# Altium PCB output.PcbDoc
Units mm, origin at the board's own origin, x right, y up, seen from the top; angles counter-clockwise.
Board outline 56 x 44 mm, 2 copper layers (Top Layer, Bottom Layer), stack 1.57 mm thick; 22 components, 29 nets, 104 pads, 63 vias.
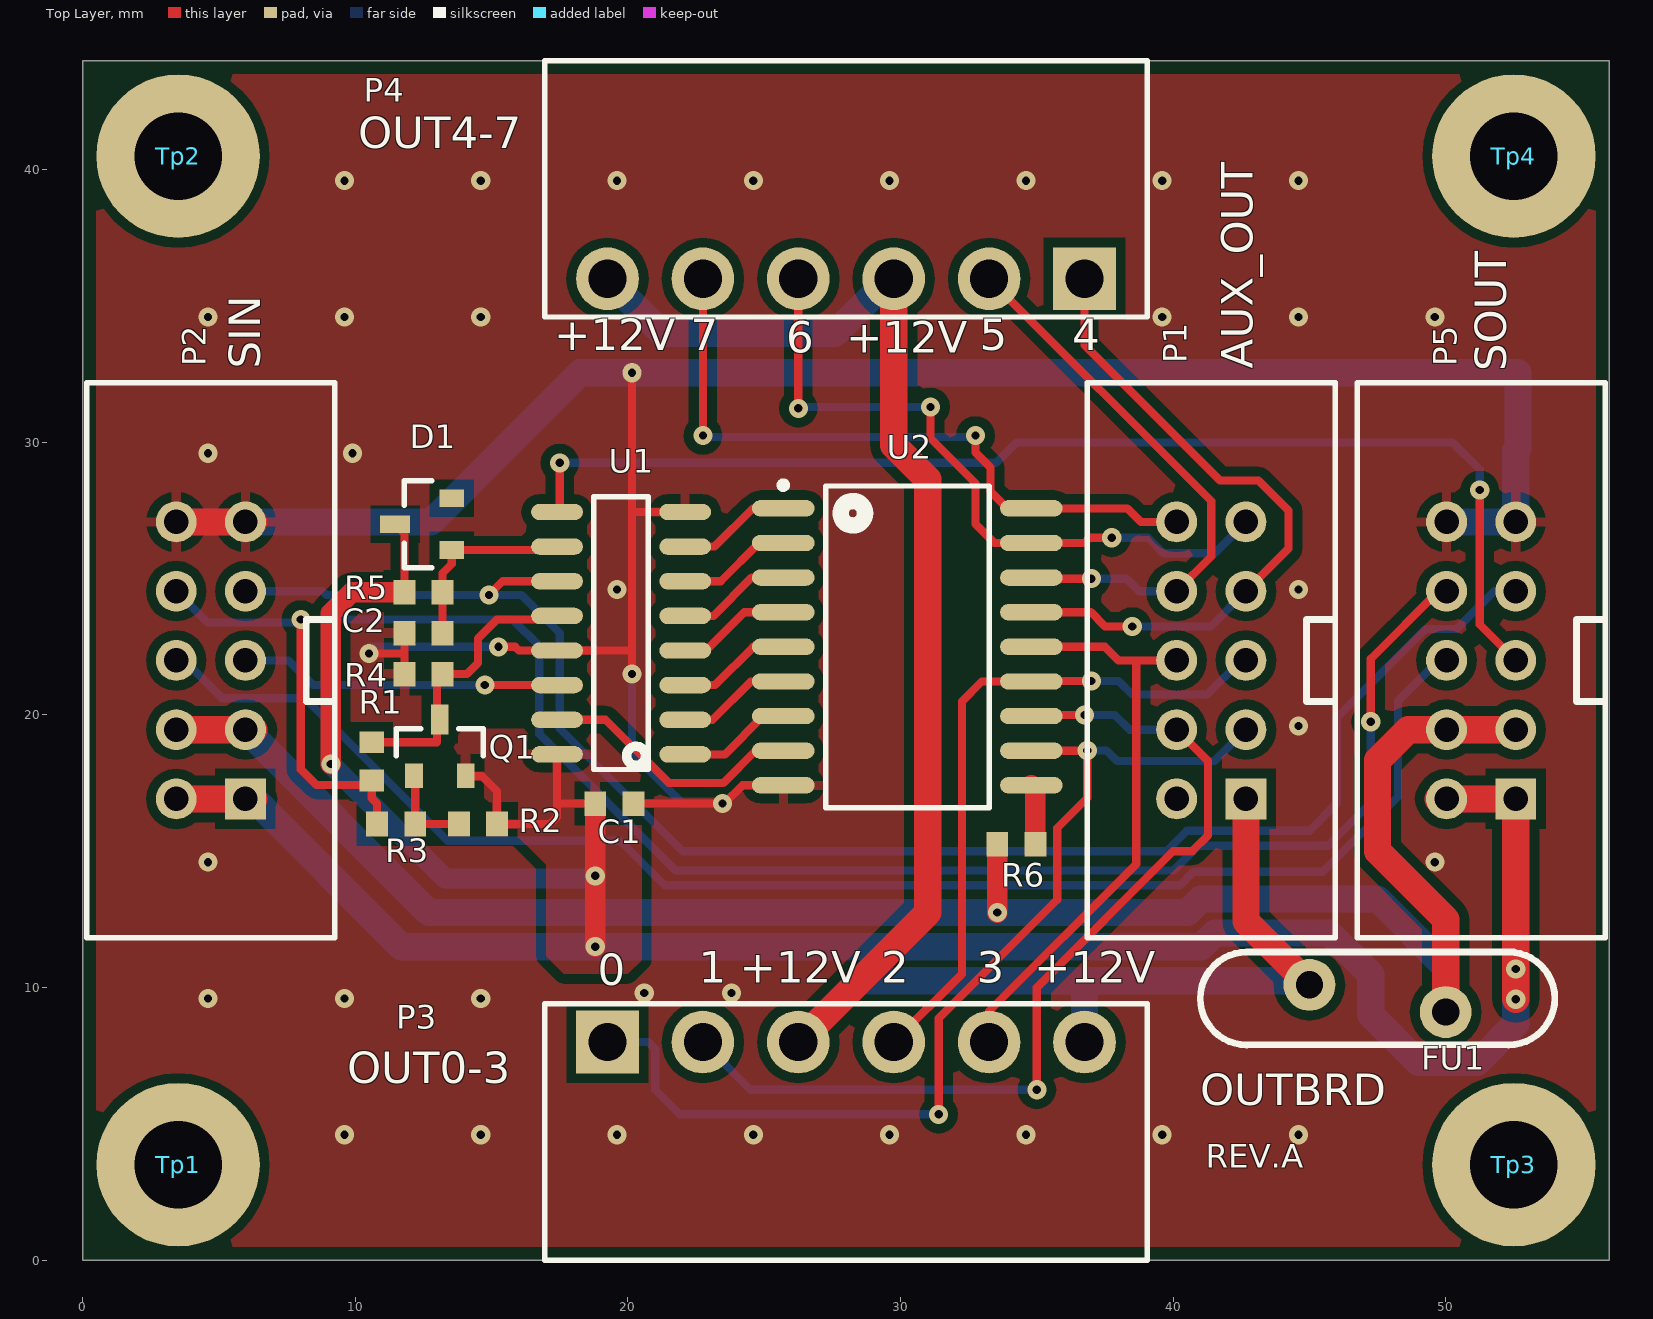
[diagram p0: Top Layer view]
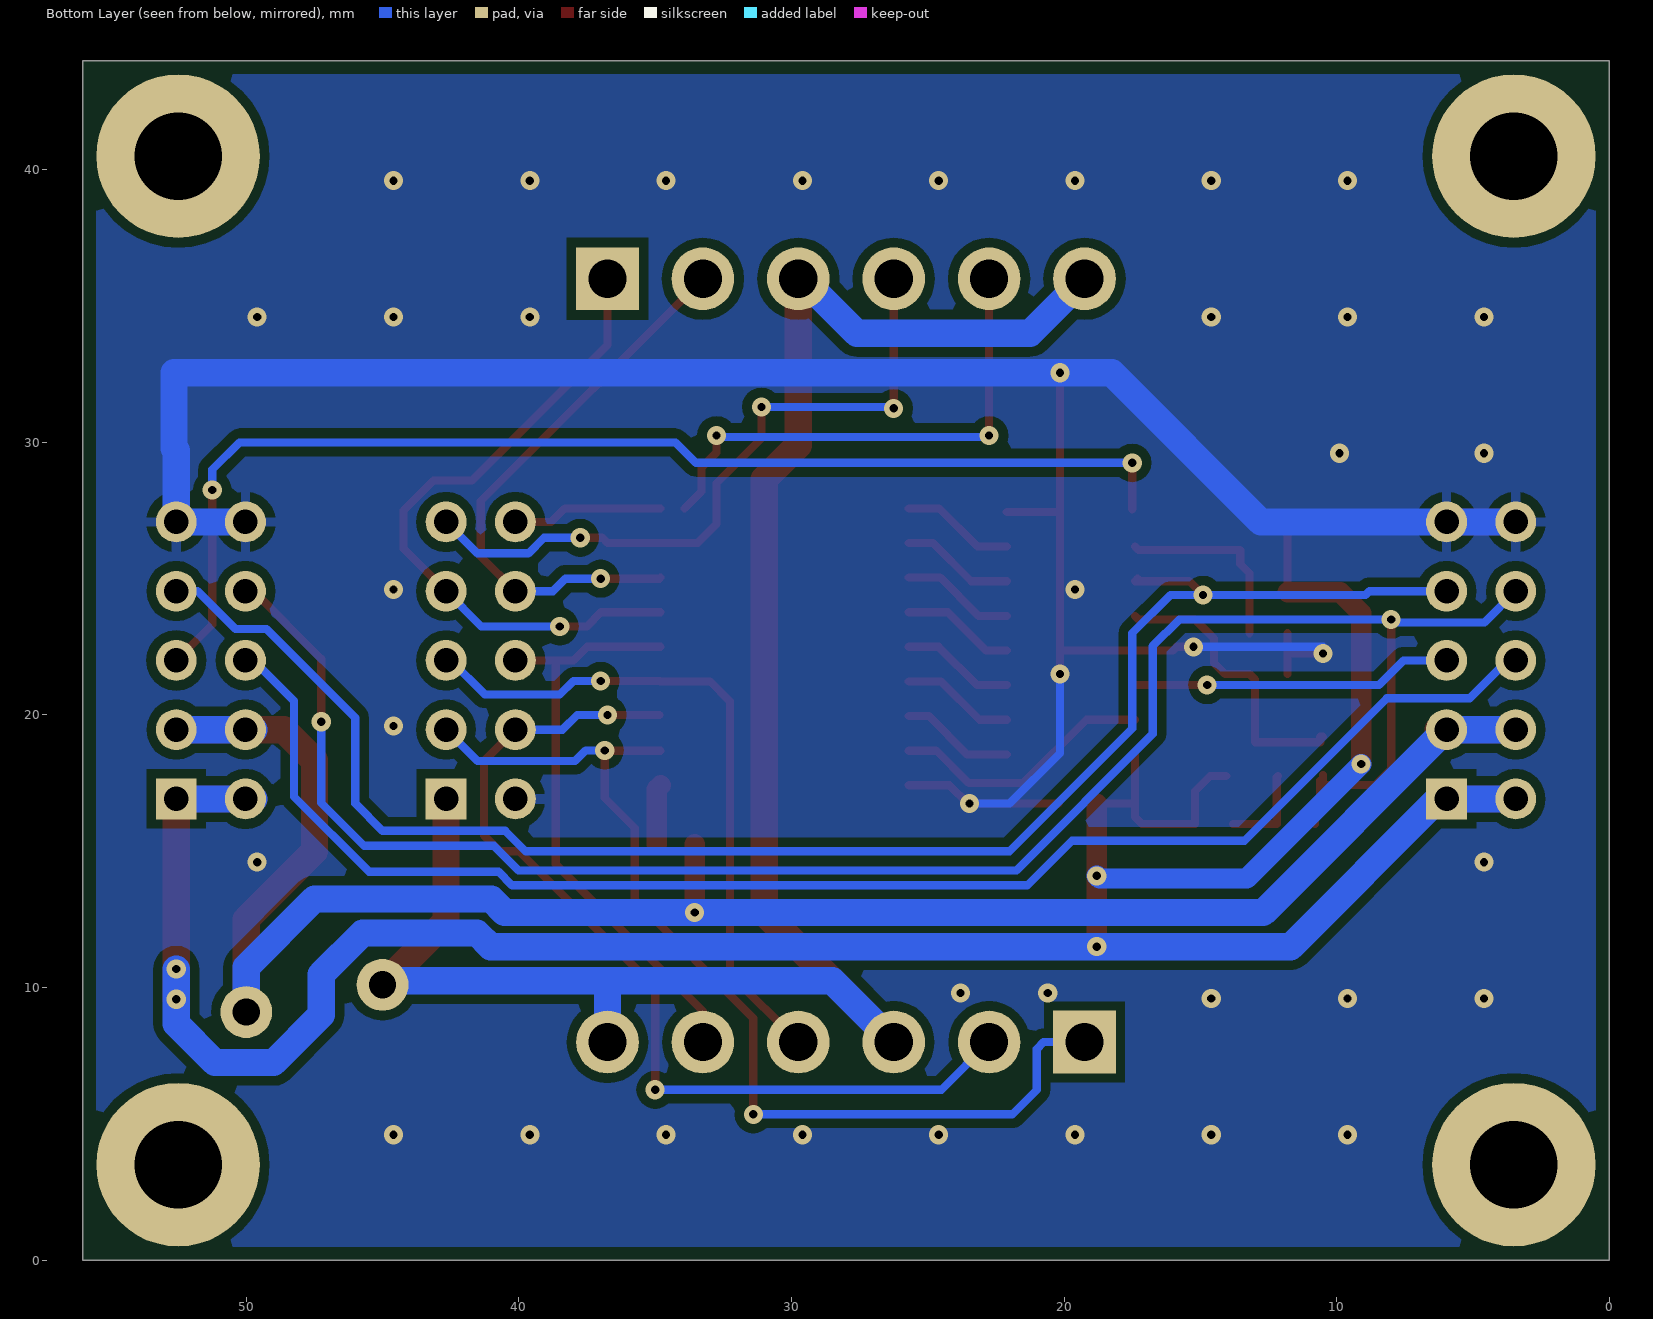
[diagram p1: Bottom Layer view, seen from below]
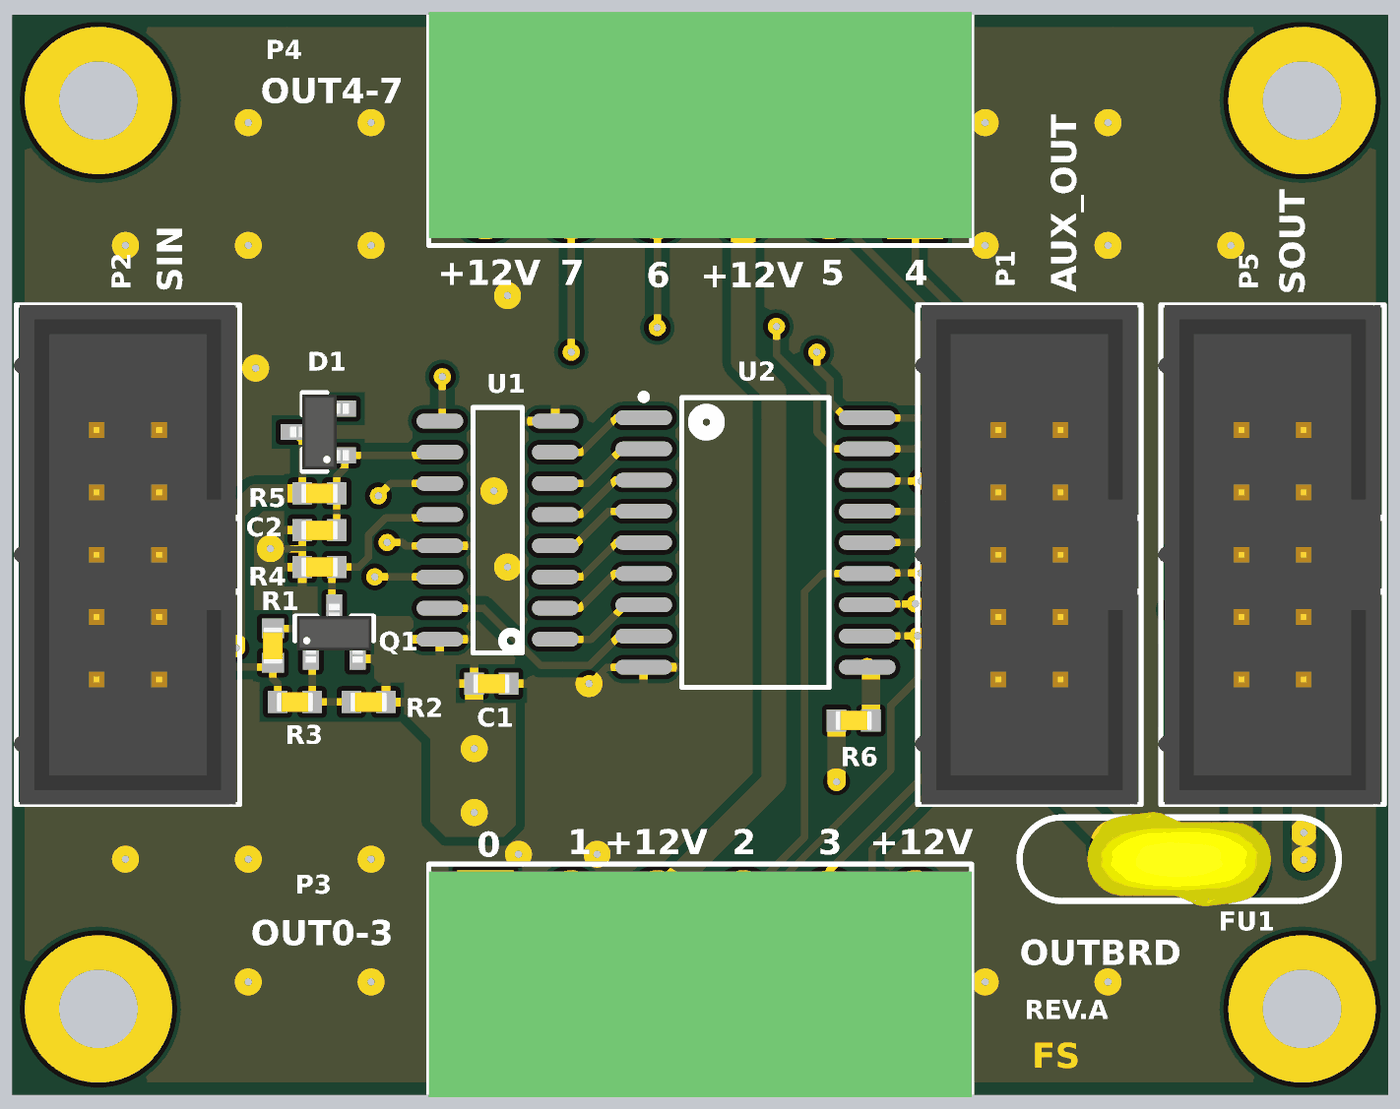
[diagram p2: 3D render of the assembled board from above, using the file's embedded part models]

## Layer stack, top to bottom
Top Solder: solder mask 0.0102, Solder Resist, Dk 3.5
Top Layer: signal copper 0.035
Dielectric1: core 1.5, FR-4, Dk 4.2
Bottom Layer: signal copper 0.035
Bottom Solder: solder mask 0.0102, Solder Resist, Dk 3.5

## Board outline
0,0 56,0 56,24 56,40 56,44 0,44

## Design rules (kind name [scope] priority, off if disabled: settings)
Clearance [All] p1: gap=0.25 except(0.35: Arc-Poly Track-Poly SMDPad-Poly THPad-Poly Via-Poly Fill-Poly Poly-Poly)
ComponentClearance [All] p1: gap=0.25 collisioncheckmode=3 verticalgap=0.25 showdistances=FALSE
HoleSize [All] p1: absolutevalues=TRUE maxlimit=10 minlimit=0.2 maxpercent=80.000 minpercent=20.000
HoleToHoleClearance [All] p1: gap=0.25 allowstackedmicrovias=TRUE
MinimumSolderMaskSliver [All] p1: minsoldermaskwidth=0.15
PlaneClearance [All] p1: clearance=0.5
PlaneConnect PlaneConnect_via [isvia] p1: planeconnectstyle=Direct reliefexpansion=0.508 reliefentries=4 reliefconductorwidth=0.254 reliefairgap=0.254
PlaneConnect [All] p2: planeconnectstyle=Relief reliefexpansion=0.6 reliefentries=4 reliefconductorwidth=0.35 reliefairgap=0.35
PolygonConnect PolygonConnect_via [isvia] p1: connectstyle=Direct reliefconductorwidth=0.254 reliefentries=4 polygonreliefangle="90 Angle" airgapwidth=0.254
PolygonConnect [All] p2: connectstyle=Relief reliefconductorwidth=0.35 reliefentries=4 polygonreliefangle="90 Angle" airgapwidth=0.35
RoutingVias [All] p1: holewidth=0.3 width=0.7 viastyle="Through Hole" minholewidth=0.2 minwidth=0.5 maxholewidth=0.5 maxwidth=1
SilkToSilkClearance [All] p1: silktosilkclearance=0.1
SilkToSolderMaskClearance [IsPad] p1: minsilkscreentomaskgap=0.15 clearancetoexposedcopper=TRUE
SolderMaskExpansion SolderMaskExpansion_via [isVia] p1: expansion=-10
SolderMaskExpansion [All] p2: expansion=0.2
Width [All] p1: maxlimit=5 minlimit=0.15 preferedwidth=0.25
22 further rules are at their usual default settings.

## Components (designator, comment, footprint, x,y, rotation, side; value= is the part's Value field where it differs from the comment)
C1 "100nF" 0603_[1608] 19.5,16.75 r180 top
C2 "100nF" 0603_[1608] 12.5,23 r0 top
D1 "BAV99" SOT-23 12.5,27 r180 top
FU1 "RXEF110" RADIAL_5.08mm_polyswitch 47.5,9.6 r180 top
P1 "OUT_AUX" HEADER_2X5_2.54MM_THD_BOXED 41.4,22 r90 top
P2 "SER_IN" HEADER_2X5_2.54MM_THD_BOXED 4.7,22 r90 top
P3 "OUT0-3" TBLOCK_1X6_3.5MM_HOR_THD 28,8 r0 top
P4 "OUT4-7" TBLOCK_1X6_3.5MM_HOR_THD 28,36 r180 top
P5 "SER_OUT" HEADER_2X5_2.54MM_THD_BOXED 51.3,22 r90 top
Q1 "BC807" SOT-23 13.1,18.8 r90 top
R1 "NP" 0603_[1608] 10.6,18.3 r270 top
R2 "4K7" 0603_[1608] 14.5,16 r0 top
R3 "10K" 0603_[1608] 11.5,16 r180 top
R4 "4K7" 0603_[1608] 12.5,21.5 r180 top
R5 "100K" 0603_[1608] 12.5,24.5 r180 top
R6 "0R" 0603_[1608] 34.25,15.25 r0 top
Tp1 "" Hole_M3x6mm 3.5,3.5 r0 top locked
Tp2 "" Hole_M3x6mm 3.5,40.5 r0 top locked
Tp3 "" Hole_M3x6mm 52.5,3.5 r0 top
Tp4 "" Hole_M3x6mm 52.5,40.5 r0 top
U1 "74HC595" SOIC16 19.75,23 r180 top
U2 "ULN2803" SOIC18 30.25,22.5 r0 top

## Footprints (in the part's own frame and the unit in brackets; to place one, negate y for a bottom-side part, rotate by r counter-clockwise, add the part's x,y. Pads: shape width x height; smd on the part's side, far side on the other; paste and mask are expansions set on the pad)
0603_[1608] [mm] "Chip Capacitor, Body 1.6x0.8mm, IPC High Density"
  rect 0.8x0.9 smd: 1(-0.7,0) 2(0.7,0)
  body extent -0.75,-0.4 0.75,0.4, height 0.67
HEADER_2X5_2.54MM_THD_BOXED [mm] "pin header 2.54mm 2row 10pin boxed"
  rect 1.5x1.5 hole 0.9: 1(-5.08,-1.27)
  round 1.5 hole 0.9: 2(-5.08,1.27) 3(-2.54,-1.27) 4(-2.54,1.27) 5(0,-1.27) 6(0,1.27) 7(2.54,-1.27) 8(2.54,1.27) 9(5.08,-1.27) 10(5.08,1.27)
  silkscreen extent -10.18,-4.55 10.18,4.55, body extent -10.18,-4.4 10.18,4.65, height 8.9
Hole_M3x6mm [mm]
  round 6 hole 3.2 paste-10: 1(0,0)
RADIAL_5.08mm_polyswitch [mm]
  round 1.9 hole 1: 1(-2.5,0.5) 2(2.5,-0.5)
  silkscreen extent -6.5,-1.7 6.5,1.7, body extent -3.75,-1.92 3.74,1.93, height 10.74
SOIC16 [mm] "SOIC, 16-Leads, Body 9.9x3.9mm, Pitch 1.27mm, IPC High Density"
  oval 1.9x0.6 smd: 1(-2.35,4.445) 2(-2.35,3.175) 3(-2.35,1.905) 4(-2.35,0.635) 5(-2.35,-0.635) 6(-2.35,-1.905) 7(-2.35,-3.175) 8(-2.35,-4.445) 9(2.35,-4.445) 10(2.35,-3.175) 11(2.35,-1.905) 12(2.35,-0.635) 13(2.35,0.635) 14(2.35,1.905) 15(2.35,3.175) 16(2.35,4.445)
  silkscreen extent -1,-5 1,5, body extent -2,-5 2,5, height 1.91
SOIC18 [mm] "SOIC, 18-Leads, Body 11.5x7.5mm, Pitch 1.27mm, IPC Medium Density"
  oval 2.3x0.6 smd: 1(-4.55,5.08) 2(-4.55,3.81) 3(-4.55,2.54) 4(-4.55,1.27) 5(-4.55,0) 6(-4.55,-1.27) 7(-4.55,-2.54) 8(-4.55,-3.81) 9(-4.55,-5.08) 10(4.55,-5.08) 11(4.55,-3.81) 12(4.55,-2.54) 13(4.55,-1.27) 14(4.55,0) 15(4.55,1.27) 16(4.55,2.54) 17(4.55,3.81) 18(4.55,5.08)
  silkscreen extent -4.67,-5.9 3,6.05, body extent -3.8,-5.95 3.8,5.95, height 2.65
SOT-23 [mm] "SOT23, 3-Leads, Body 2.9x1.3mm, Pitch 0.95mm, Lead Span 2.5mm, IPC High Density"
  rect 0.9x0.65 smd: 1(-1.038,0.95) 2(-1.038,-0.95)
  rect 1.1x0.65 smd: 3(1.038,0)
  silkscreen extent -0.3,-1.6 0.7,1.6, body extent -1.2,-1.52 1.2,1.52, height 1.22
TBLOCK_1X6_3.5MM_HOR_THD [mm] "3,50mm - PCB Horizontal - 06p"
  rect 2.3x2.3 hole 1.4: 1(-8.75,0)
  round 2.3 hole 1.4: 2(-5.25,0) 3(-1.75,0) 4(1.75,0) 5(5.25,0) 6(8.75,0)
  silkscreen extent -11.05,-8 11.05,1.4, body extent -11.05,-8.1 11.05,1.1, height 7.21

## Part data
C1 C2: library part Cap, "Ceramic X5R 6.3V, 10V"
D1: "SOT23"
FU1: library part FuseAutoReset, "Fuse"
P1 P2 P5: library part "Header 5X2", "Header, 5-Pin, Dual row"
P3 P4: library part "Header 6", "Header, 6-Pin"
Q1: "PNP transistor"
R1 R2 R3 R4 R5 R6: library part Res1, "Resistor"
Tp1 Tp2 Tp3 Tp4: library part Test_point
U1: "8-bit shift register with 3-state output registers"
U2: "BJT Darlinton Array"

## Via types
v1: diameter 0.7, hole 0.3, Top Layer to Bottom Layer, 63 vias

## Nets (pads, with @x,y where several pads share a name; then routed paths per layer and width w, separated by ;. In a path a pad name is that pad's centre, name@x,y a point inside that pad or via, vN(x,y) a via of type N, cw(c..) or ccw(c..) an arc to the next point about the centre after c; other vN are vias at no path point)
+12V: FU1.1 P2.3 P2.4 P5.3 P5.4 R6.1 | length 74.6
  Top Layer w0.75: v1(33.55,12.75) R6.1
  Top Layer w1: P2.4@3.73,19.46 P2.3 P2.3@6.27,19.46 ; FU1.1@50,9.5 50,12.5 47.5,15 47.5,18.336 48.624,19.46 P5.4 P5.3@52.27,19.46
  Bottom Layer w1: P2.4@3.73,19.46 P2.3 5.991,19.46 12.701,12.75 40.518,12.75 41.018,13.25 47.5,13.25 50,10.75 FU1.1 ; P5.4@49.73,19.46 P5.4 P5.3@52.27,19.46
GND: C1.1 C2.1 P1.2 P2.9 P2.10 P5.9 P5.10 R4.2 U1.8 U1.13 U2.9 | length 99.8
  Top Layer w0.3: v1(10.5,22.25) 11.8,22.25 ; R4.2 11.8,22.25 ; C2.1 11.8,22.25 ; v1(15.25,22.5) 15.865,22.5 16,22.365 U1.13 20.09,22.365 20.155,22.3 ; v1(20.155,32.555) 20.155,27.445 ; C1.1 v1(23.472,16.75) ; v1@20.25,21.405 v1(20.155,21.5) 20.155,22.3 ; U1.8 20.155,27.445 ; v1@23.528,16.75 24.198,17.42 U2.9 ; 20.155,22.3 20.155,27.445
  Top Layer w1: P2.10@3.73,27.08 P2.9 P2.9@6.27,27.08
  Bottom Layer w0.3: v1@10.5,22.5 v1(15.25,22.5) ; v1(20.155,21.5) 20.155,18.595 22,16.75 v1(23.472,16.75)
  Bottom Layer w1: P2.10@3.73,27.08 P2.9 12.78,27.08 18.25,32.55 v1@20.155,32.55 ; v1@20.2,32.55 52.65,32.55 52.65,29.78 52.57,29.7 P5.9 ; P5.10 P5.9@52.27,27.08
  other v1: 9.6,4.6 14.6,4.6 19.6,4.6 24.6,4.6 29.6,4.6 34.6,4.6 39.6,4.6 44.6,4.6 4.6,9.6 9.6,9.6 14.6,9.6 20.6,9.8 23.8,9.8 4.6,14.6 49.6,14.6 44.6,19.6 19.6,24.6 44.6,24.6 4.6,29.6 9.9,29.6 4.6,34.6 9.6,34.6 14.6,34.6 39.6,34.6 44.6,34.6 49.6,34.6 9.6,39.6 14.6,39.6 19.6,39.6 24.6,39.6 29.6,39.6 34.6,39.6 39.6,39.6 44.6,39.6
NetC2_2: C2.2 D1.1 R5.1 U1.10 | length 7.1
  Top Layer w0.3: C2.2 R5.1 13.2,25.2 13.538,25.538 D1.1 17.275,26.05 U1.10
NetFU1_2: FU1.2 P1.1 P3.3 P3.6 P4.3 P4.6 | length 72.3
  Top Layer w1: P3.3 31,12.75 31,28.647 29.75,29.897 P4.3 ; P1.1 42.67,12.43 FU1.2
  Bottom Layer w1: P4.6 21.25,34 27.6,34 29.6,36 P4.3 ; P3.3 28.5,10.25 44.85,10.25 FU1.2 ; P3.6 36.75,10.175
NetP2_5: P2.5 U1.14 | length 11.8
  Top Layer w0.3: v1(14.75,21.1) 17.395,21.1 U1.14
  Bottom Layer w0.3: P2.5 7.551,22 8.451,21.1 v1(14.75,21.1)
NetP2_6: P2.6 P5.6 | length 54.9
  Bottom Layer w0.3: P2.6@3.73,22 5.12,20.61 8.163,20.61 13.386,15.386 19.714,15.386 21.35,13.75 40.245,13.75 40.745,14.25 45.5,14.25 48.25,17 48.25,20.52 P5.6@49.73,22
NetP2_7: P2.7 P5.7 U1.11 | length 61.1
  Top Layer w0.3: v1(14.9,24.4) 15.405,24.905 U1.11@17.21,24.905 ; U1.11@17.21,24.905 17.305,25 U1.11 U1.11@17.21,24.905
  Bottom Layer w0.3: P2.7 8.8,24.54 8.94,24.4 v1(14.9,24.4) 16.1,24.4 17.5,23 17.5,19.5 22,15 39.75,15 40.5,15.75 45,15.75 46,16.75 46,19.896 49.254,23.15 50.4,23.15 51.79,24.54 P5.7@52.27,24.54
NetP2_8: P2.8 P5.8 R1.2 R3.2 | length 70.1
  Top Layer w0.3: v1(8,23.5) 8,18 8.575,17.425 R1.2@10.6,17.425 ; R1.2@10.5,17.6 R1.2@10.5,17.8 ; R1.2 R1.2@10.6,17.425 ; R3.2 10.8,16.75 10.6,16.95 R1.2@10.6,17.425 ; v1(47.25,19.75) 47.25,22.06 P5.8@49.73,24.54
  Bottom Layer w0.3: P2.8 4.58,23.39 7.89,23.39 v1(8,23.5) 15.773,23.5 16.75,22.523 16.75,19.301 21.751,14.3 40.017,14.3 40.917,15.2 45.672,15.2 47.25,16.778 v1(47.25,19.75)
NetP5_5: P5.5 U1.9 | length 43.7
  Top Layer w0.3: U1.9@17.5,27.545 v1(17.5,29.25) ; v1(51.25,28.25) 51.25,23.32 P5.5
  Bottom Layer w0.3: v1(17.5,29.25) 33.5,29.25 34.25,30 50.25,30 51.25,29 v1(51.25,28.25)
NetQ1_1: Q1.1 R2.1 R3.1 | length 3.4
  Top Layer w0.3: Q1.1 12.2,17.713 R3.1 R2.1
NetQ1_3: Q1.3 R1.1 R4.1 U1.12 | length 10.7
  Top Layer w0.3: R1.1@10.5,19.2 R1.1@10.6,19.2 ; R1.1 13,19 13,19.1 13,21.3 R4.1 14.089,21.5 14.5,21.911 14.5,22.811 15.189,23.5 17.265,23.5 U1.12
NetR6_2: R6.2 U2.10 | length 2.2
  Top Layer w0.75: U2.10 34.95,17.27 R6.2
O0: P1.3 P3.1 U2.11 | length 37.9
  Top Layer w0.3: 31.4,5.7 31.4,8.872 35.75,13.222 35.75,15.85 36.85,16.95 v1@36.85,18.69 ; U2.11 v1@36.85,18.69 ; v1(36.85,18.7) v1@36.85,18.69
  Bottom Layer w0.3: P3.1 20.75,8 21,7.75 21,6.25 21.9,5.35 v1(31.4,5.35) ; v1(36.85,18.7) 37.55,18.7 37.94,18.31 41.52,18.31 P1.3
O1: P1.4 P3.2 U2.12 | length 35.2
  Top Layer w0.3: U2.12@34.84,20 v1(36.75,20) ; v1(35,6.25) 35,10 40,15 40.7,15 41.28,15.58 41.28,18.31 P1.4
  Bottom Layer w0.3: P3.2 24.5,6.25 v1(35,6.25) ; v1(36.75,20) 37.86,20 38.4,19.46 P1.4
O2: P1.5 P3.4 U2.13 | length 25
  Top Layer w0.3: P3.4 32.25,10.5 32.25,20.5 32.98,21.23 U2.13 34.82,21.25 v1(37,21.25)
  Bottom Layer w0.3: v1(37,21.25) 38,21.25 38.5,20.75 41.25,20.75 42.5,22 P1.5
O3: P1.6 P3.5 U2.14 | length 21.9
  Top Layer w0.3: P3.5 33.25,9.131 38.65,14.531 38.65,21.95 38.6,22 ; U2.14 36.75,22.5 37.5,22.5 38,22 38.6,22 ; P1.6@40.08,21.95 P1.6 38.6,22
O4: P1.7 P4.1 U2.15 | length 24.7
  Top Layer w0.3: U2.15 36.98,23.77 37.5,23.25 v1(38.5,23.25) ; P4.1 36.75,33.57 41.717,28.603 43.127,28.603 44.23,27.5 44.23,26.1 P1.7
  Bottom Layer w0.3: v1(38.5,23.25) 41.38,23.25 P1.7
O5: P1.8 P4.2 U2.16 | length 20.9
  Top Layer w0.3: P4.2 41.4,27.85 41.4,25.81 P1.8 ; U2.16 34.84,25 v1(37,25)
  Bottom Layer w0.3: v1(37,25) 38.29,25 38.75,24.54 P1.8
O6: P1.9 P4.4 U2.17 | length 25.6
  Top Layer w0.3: v1(26.25,31.25) P4.4 ; v1(31.1,31.3) 31.1,30.15 32.75,28.5 32.75,27 33.44,26.31 U2.17 36.75,26.31 36.94,26.5 v1(37.75,26.5)
  Bottom Layer w0.3: v1(26.25,31.25) 26.3,31.3 v1(31.1,31.3) ; v1(37.75,26.5) 39.084,26.5 39.654,25.93 41.52,25.93 P1.9
O7: P1.10 P4.5 U2.18 | length 24.5
  Top Layer w0.3: v1(22.75,30.25) P4.5 ; v1(32.75,30.25) 32.75,29.63 33.3,29.08 33.3,28.2 U2.18@33.92,27.58 ; U2.18 38.32,27.58 38.82,27.08 P1.10
  Bottom Layer w0.3: v1(22.75,30.25) 22.8,30.2 32.7,30.2 v1(32.75,30.25)
Q0: U1.15 U2.8 | length 9.8
  Top Layer w0.3: U1.15 19.175,19.825 21.5,17.5 23.5,17.5 24.69,18.69 U2.8
Q1: U1.1 U2.7 | length 4.2
  Top Layer w0.3: U1.1 23.555,18.555 24.96,19.96 U2.7
Q2: U1.2 U2.6 | length 4.2
  Top Layer w0.3: U1.2 23.103,19.825 24.508,21.23 U2.6
Q3: U1.3 U2.5 | length 4.2
  Top Layer w0.3: U1.3 22.105,21.1 23.2,21.1 24.6,22.5 U2.5
Q4: U1.4 U2.4 | length 4.2
  Top Layer w0.3: U1.4 22.865,22.365 24.27,23.77 U2.4
Q5: U1.5 U2.3 | length 4.2
  Top Layer w0.3: U1.5 23.135,23.635 24.54,25.04 U2.3
Q6: U1.6 U2.2 | length 4.2
  Top Layer w0.3: U1.6 23.405,24.905 24.81,26.31 U2.2
Q7: U1.7 U2.1 | length 4.2
  Top Layer w0.3: U1.7 23.175,26.175 24.58,27.58 U2.1
VCC: C1.2 D1.3 P2.1 P2.2 P5.1 P5.2 Q1.2 R2.2 R5.2 U1.16 | length 108.2
  Top Layer w0.3: D1.3 11.8,26.663 R5.2 ; Q1.2 14.638,17.762 15.2,17.2 R2.2 17.145,16 17.4,16.255 17.4,16.75 ; U1.16 17.4,16.75 ; C1.2 17.4,16.75
  Top Layer w0.75: v1(9.1,18.2) 9.1,23.725 9.875,24.5 R5.2 ; v1(18.8,11.5) C1.2
  Top Layer w1: P2.2@3.73,16.92 P2.1 P2.1@6.27,16.92 ; P5.2@49.73,16.92 P5.2 P5.1@52.27,16.92 ; v1(52.57,9.57) v1(52.57,10.68) P5.1
  Bottom Layer w0.75: v1(9.1,18.2) 13.3,14 18.7,14 v1(18.8,14.1)
  Bottom Layer w1: P2.2@3.73,16.92 P2.1 6.27,16.92 11.69,11.5 v1(18.8,11.5) 41.036,11.5 41.536,12 45.732,12 47.25,10.482 47.25,9 49,7.25 51.15,7.25 52.57,8.67 v1(52.57,9.57) v1(52.57,10.68) ; P5.2@49.73,16.92 P5.2 P5.1@52.27,16.92
pads on no net: D1.2 Tp1.1 Tp2.1 Tp3.1 Tp4.1

## Polygon pours and split planes (outlines as drawn)
GND on Top Layer "topgnd" (solid, remove dead copper, pour order 11): 0.5,43.5 55.5,43.5 55.5,0.5 0.5,0.5
VCC on Top Layer "topvcc" (solid, remove dead copper, pour order 6): 14.5,19.5 20.5,19.5 20.5,18.5 20.5,11.5 20.5,11 20.25,10.75 20,10.5 19.5,10.5 17.64,10.5 17.355,10.785 17,11.14 17,12.5 17,14.5 16.5,15 16,15.5 15.5,15.5 14.216,15.5 13.05,16.666 13.05,16.75 13.05,18.45 13,18.5 14,19.5
GND on Bottom Layer "botgnd" (solid, remove dead copper, pour order 7): 0.5,43.5 55.5,43.5 55.5,0.5 0.5,0.5

## Silkscreen, mask and mechanical layers (free items; w line width, h text height)
Top Overlay:
  text "OUT4-7" at 10.1,40.4 h2
  text "+12V" at 17.3,33 h2
  text "7" at 22.3,33 h2
  text "5" at 32.9,33 h2
  text "4" at 36.3,33 h2
  text "6" at 25.8,32.9 h2
  text "+12V" at 28,32.9 h2
  text "SIN" at 6.9,32.7 h2 r90
  text "AUX_OUT" at 43.3,32.7 h2 r90
  text "SOUT" at 52.6,32.6 h2 r90
  text "1" at 22.6,9.8 h2
  text "+12V" at 24.1,9.8 h2
  text "2" at 29.3,9.8 h2
  text "3" at 32.8,9.8 h2
  text "+12V" at 34.9,9.8 h2
  text "0" at 18.9,9.7 h2
  text "OUT0-3" at 9.7,6.1 h2
  text "OUTBRD" at 41,5.3 h2
  text "REV.A" at 41.2,3.1 h1.5
Top Solder:
  text "FS" at 41.5,1.1 h2
Bottom Solder:
  text "FS" at 43.3,1.2 h2
Outline:
  lines w0.2: 0,0 0,44 56,44 56,0 0,0
Drawing:
  circle w0.127: c0,0 r3
  circle w0.127: c0,0 r1.55
  lines w0.127: -4,0 4,0 ; 0,-4 0,4
  text "Mechanical Characteristics" at -0.6,48 h5
Assembly_top:
  text "Assembly TOP" at 20,48 h5
Assembly_bot:
  text "Assembly Bottom" at 36.328,47.839 h5
Note_top:
  text "Note TOP" at -0.672,47.839 h5
Note_bot:
  text "Note Bottom" at 36.228,47.939 h5

## Dimensions
56,0 to 56,44 on Drawing
0,0 to 56,0 on Drawing

## Text inside footprints (layer, text, board x,y; h text height)
U1: Note_top "1" at 20.95,18.7 h1 r180
U2: Note_top "1" at 27.25,27.5 h1